# Altium PCB Inter_pcb.PcbDoc
Units mil, origin at the board's own origin, x right, y up, seen from the top; angles counter-clockwise.
Board outline 1810 x 1260 mil, 2 copper layers (Top Layer, Bottom Layer); 6 components, 12 nets, 32 pads, 4 vias.
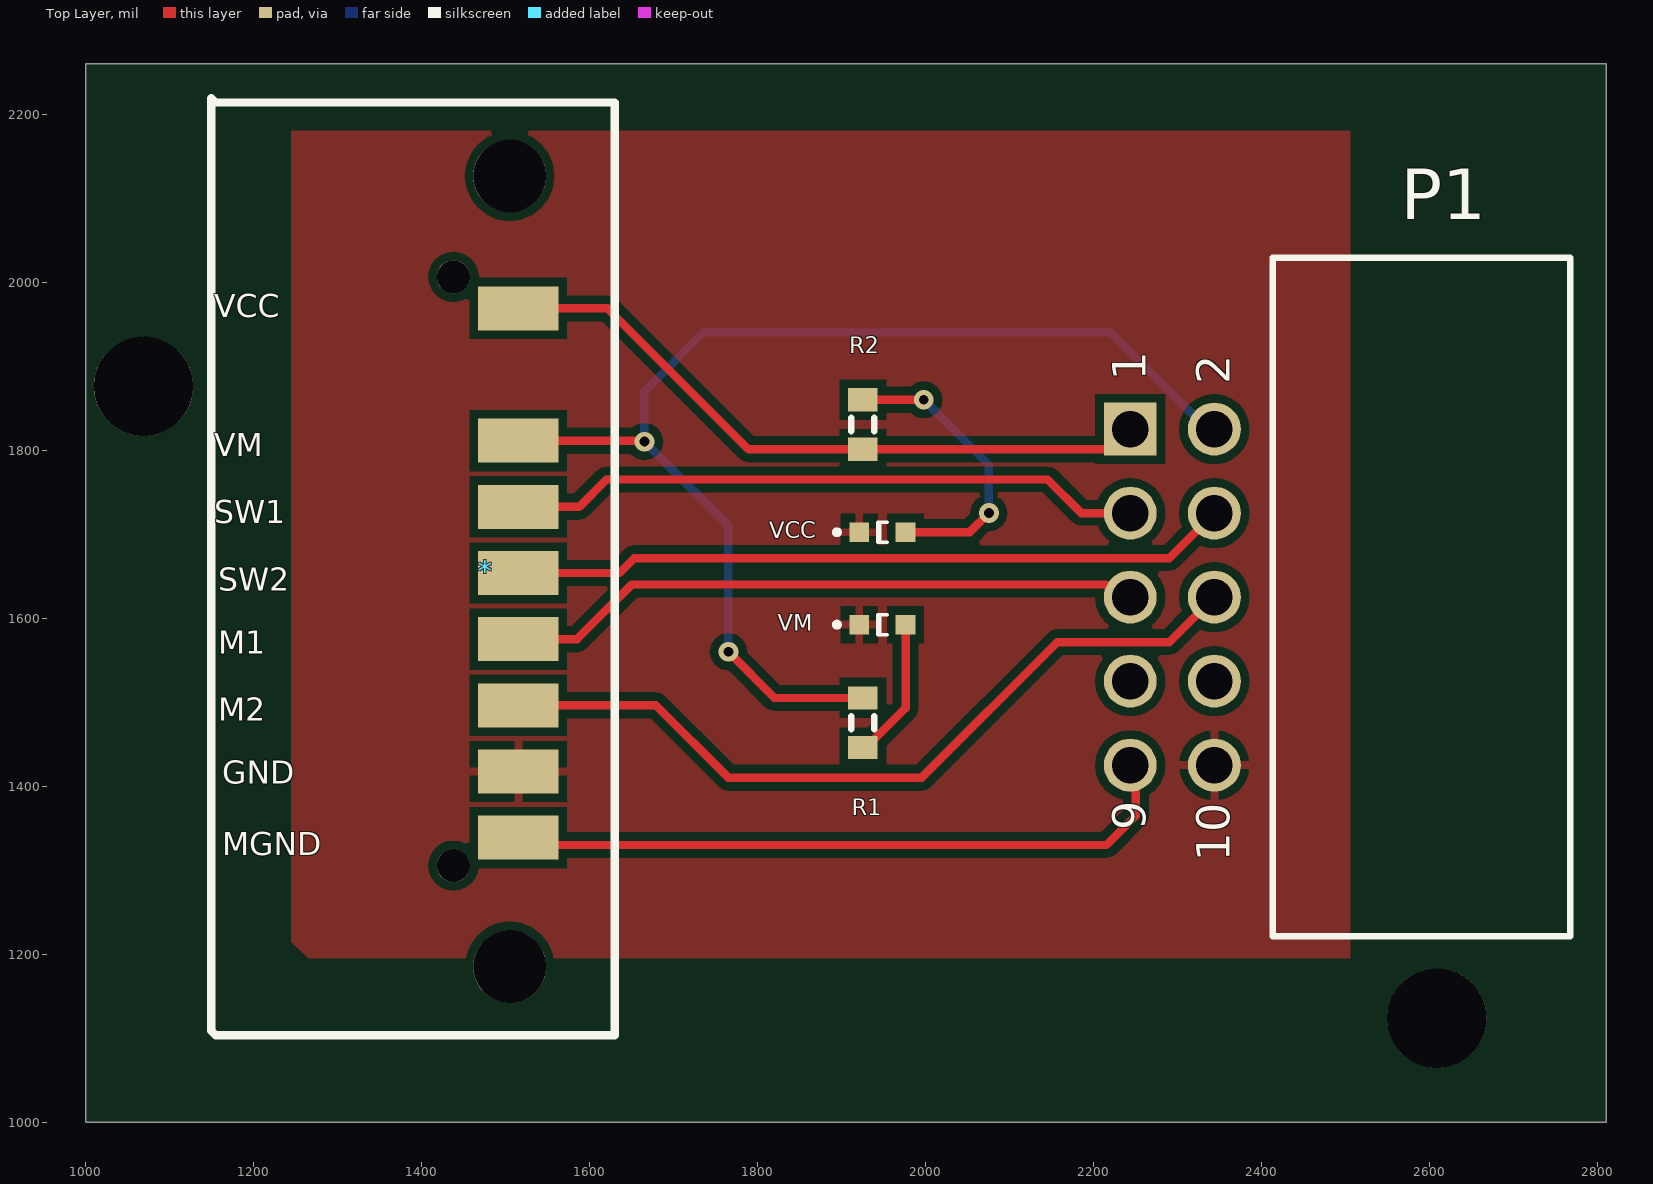
[diagram p0: Top Layer view]
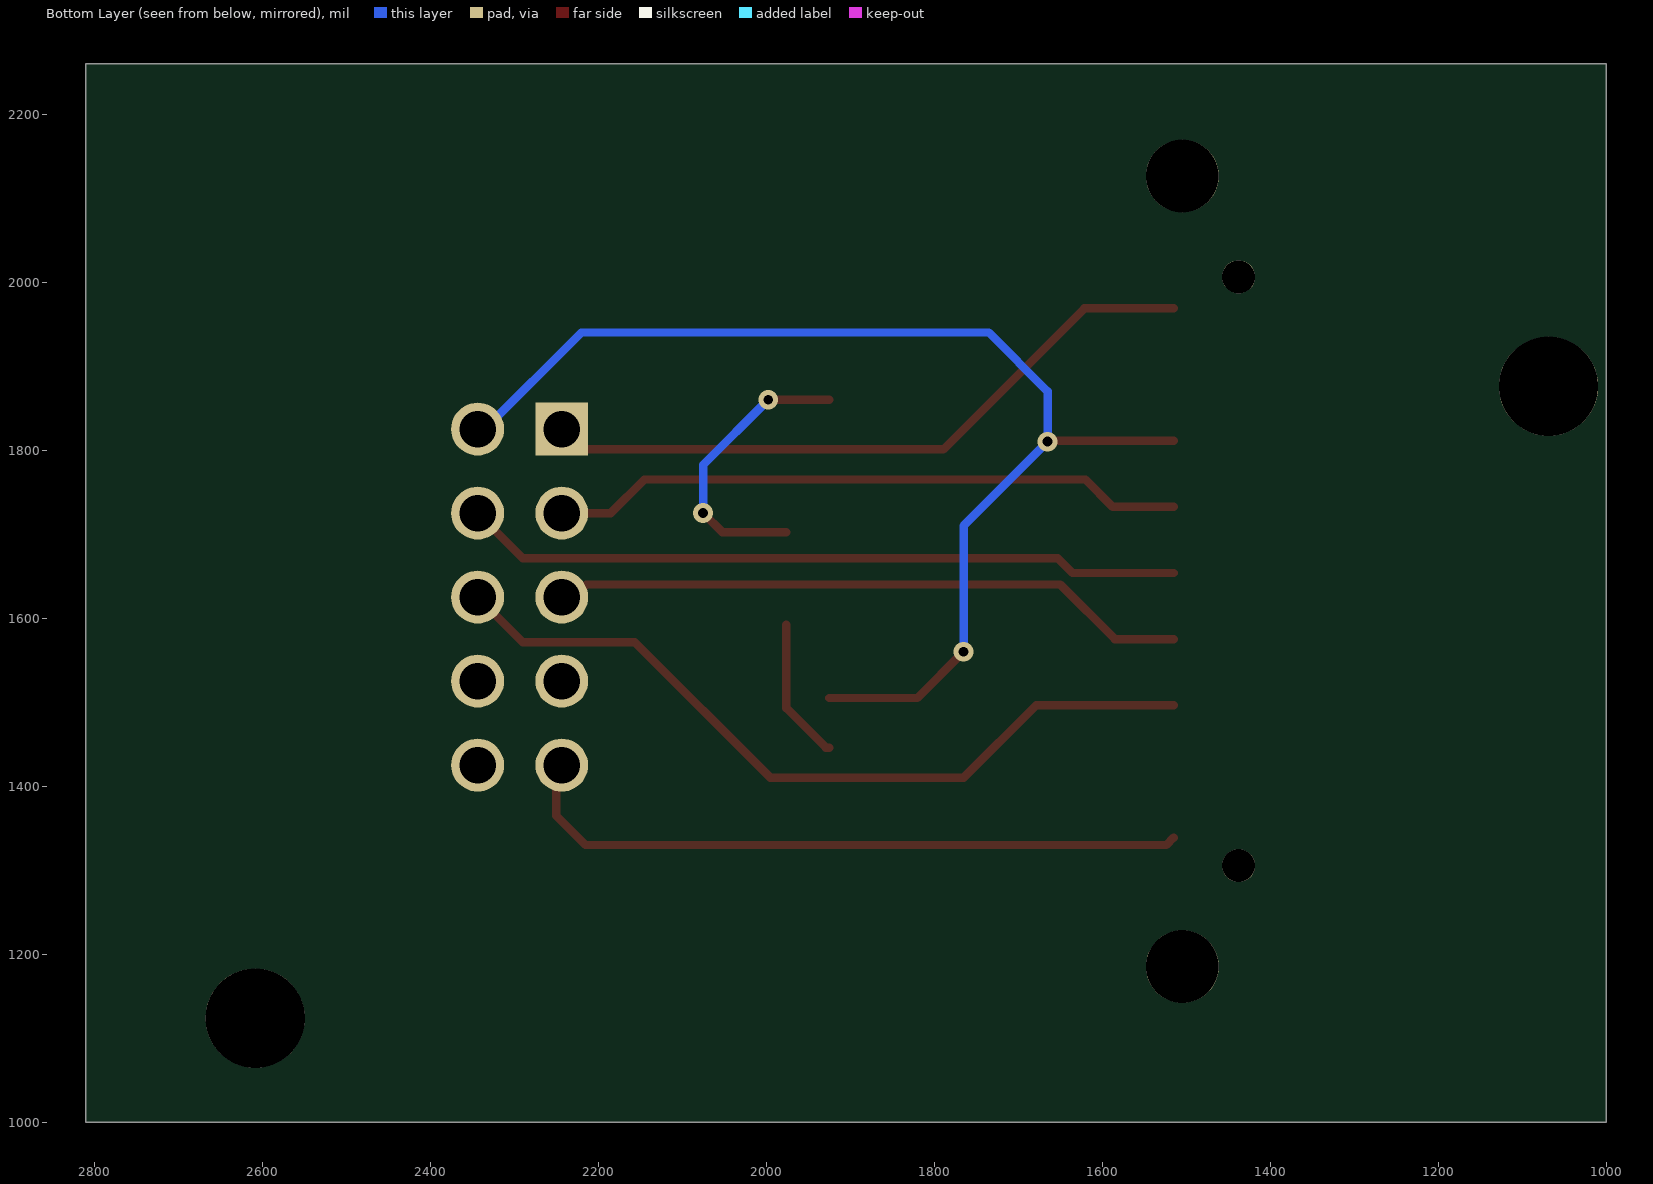
[diagram p1: Bottom Layer view, seen from below]
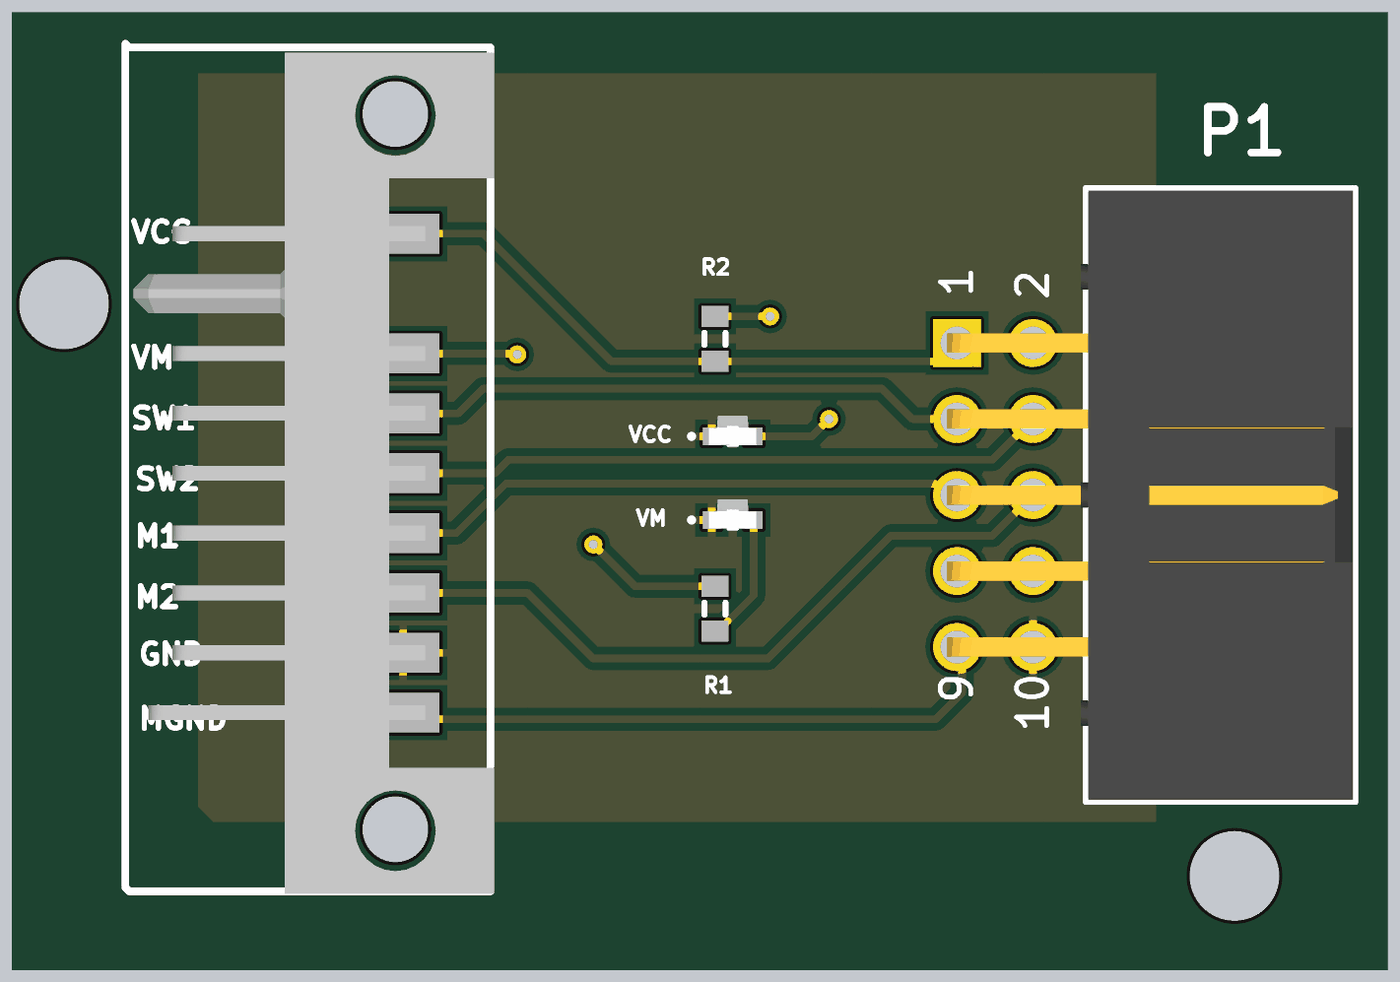
[diagram p2: 3D render of the assembled board from above, using the file's embedded part models]

## Layer stack, top to bottom
Top Solder: solder mask 0.4, Solder Resist, Dk 3.5
Top Layer: signal copper 1.4
Dielectric 1: dielectric 12.6, FR-4, Dk 4.8
Bottom Layer: signal copper 1.4
Bottom Solder: solder mask 0.4, Solder Resist, Dk 3.5

## Board outline
1000,1000 2810,1000 2810,2260 1000,2260

## Design rules (kind name [scope] priority, off if disabled: settings)
Clearance [All] p1: gap=10 ignorepadtopadclearanceinfootprint=FALSE except(0: Arc-Hole Track-Hole SMDPad-Hole THPad-Hole Via-Hole Fill-Hole Poly-Hole Region-Hole Text-Hole)
PolygonConnect [All] p1: connectstyle=Relief reliefconductorwidth=10 reliefentries=4 polygonreliefangle="90 Angle" airgapwidth=10
RoutingVias [All] p1: holewidth=28 width=50 viastyle="Through Hole" minholewidth=28 minwidth=50 maxholewidth=28 maxwidth=50
SolderMaskExpansion [All] p1: expansion=4 istentingtop=FALSE
Width [All] p1: maxlimit=10 minlimit=10 preferedwidth=10
30 further rules are at their usual default settings.

## Classes and differential pairs
component class Inter_sch: * R1

## Components (designator, comment, footprint, x,y, rotation, side; value= is the part's Value field where it differs from the comment)
* "1747785-1" 1747785-1 1437.76,2006.16 r270 top
P1 "61201021721" 61201021721 2590,1625 r90 top (schematic designator P?)
R1 "R4" J1-0603 1925,1475.47 r270 top value=10K
R2 "R3" J1-0603 1925,1830.47 r90 top value=10K
VCC "Red, 2V" WL-SMSW_0603_Rectangular 1948.33,1710.47 r0 top (schematic designator D2)
VM "Red, 2V" WL-SMSW_0603_Rectangular 1948.33,1600.47 r0 top (schematic designator D1)

## Footprints (in the part's own frame and the unit in brackets; to place one, negate y for a bottom-side part, rotate by r counter-clockwise, add the part's x,y. Pads: shape width x height; smd on the part's side, far side on the other; paste and mask are expansions set on the pad)
1747785-1 [mm]
  rect 1.33x2.43 smd: 1(0.951,1.962) 2(4.951,1.962) 3(6.951,1.962) 4(8.952,1.962) 5(10.952,1.962) 6(12.952,1.962) 7(14.952,1.962) 8(16.952,1.962)
  round 2.2 hole 2.2 unplated: ""(-3.05,1.7) ""(20.85,1.7)
  round 1 hole 1 unplated: ""(0,0) ""(17.8,0)
  Top Layer lines w0.254: 20.826,1.7 20.838,1.712
  silkscreen extent -5.4,-7.32 22.92,4.87, body extent -5.1,-7.05 23,5, height 4.71
61201021721 [mm] "10 pins, right angled, gold plating"
  rect 1.6x1.6 hole 1.1: 1(5.08,8.805)
  round 1.6 hole 1.1: 2(5.08,6.265) 3(2.54,8.805) 4(2.54,6.265) 5(0,8.805) 6(0,6.265) 7(-2.54,8.805) 8(-2.54,6.265) 9(-5.08,8.805) 10(-5.08,6.265)
  silkscreen extent -10.26,-4.5 10.26,4.5, body extent -10.18,-4.42 10.18,9.13, height 9.23
J1-0603 [mm] "Chip Resistor, Body 1.6x0.8mm, IPC High Density"
  rect 0.7x0.9 smd: 1(-0.75,0) 2(0.75,0)
  silkscreen extent -0.2,-0.35 0.2,0.35, body extent -0.85,-0.48 0.85,0.48, height 0.9
WL-SMSW_0603_Rectangular [mm] "SMT Mono-color Side view Waterclear, body 1.6x0.98mm"
  rect 0.6x0.6 smd: 1(-0.7,-0.21) 2(0.7,-0.21)
  silkscreen extent -1.45,-0.51 0.15,0.09, body extent -0.8,-0.5 0.8,0.48, height 0.8

## Part data
P1: library part CMP-1502-00021-1, "Male Box Header WR-BHD, THT, Angled, pitch 2.54 mm, 10 pins", Contact Resistance=20mOhm, Manufacturer="Wurth Elektronik", Operating Temperature=-40to125degC, Withstanding Voltage=500VAC, Working Voltage=250VAC, Datasheet URL=https://katalog.we-online.de/em/datasheet/6120xx21721.pdf, Gender=Male, Manufacturer URL=http://www.we-online.de, Mounting Technology=THT, Orientation=Angled, Package Reference=61201021721, Packaging=Tray, Part Number=61201021721, Pin Number=10, Pitch=2.54mm, Published Date=August2018, Publisher=WurthElektronik
R1 R2: library part Res3, "Resistor", LatestRevisionDate=29-May-2009, LatestRevisionNote="IPC-7351 Footprint Added.", PackageDescription="Chip Resistor", PackageReference=J1-0603, Published=8-Jun-2000, Publisher="Altium Limited"
VCC VM: library part 155060RS75300, "WL-SMSW SMT Mono-color Side View Waterclear, size 0603, Red, 2V, 140deg", Emitting Color=Red, Forward Voltage typ.=2V, Manufacturer="Wurth Elektronik", Operating Temperature="-40 to +85degC", Chip Technology=AlInGaP, ComponentLink1Description=Manufacturer, ComponentLink1URL=http://www.we-online.de, ComponentLink2Description=Datasheet, ComponentLink2URL=https://www.we-online.com/catalog/datasheet/155060RS75300.pdf, Dominant Wavelength typ.=625nm, Luminous Intensity typ.=150mcd, Manufacturer Part Number=155060RS75300, Mounting Technology=SMT, Packaging="Tape and Reel", Peak Wavelength typ.=630nm, Published Date="October 2020", Size=0603, Viewing Angle=140deg

## Free pads (board coordinates)
  round 118.11 hole 118.11 unplated: ""(1068.82,1875.91) ""(2608.19,1123.94)

## Via types
v1: diameter 23.62, hole 11.81, Top Layer to Bottom Layer, 4 vias

## Nets (pads, with @x,y where several pads share a name; then routed paths per layer and width w, separated by ;. In a path a pad name is that pad's centre, name@x,y a point inside that pad or via, vN(x,y) a via of type N, cw(c..) or ccw(c..) an arc to the next point about the centre after c; other vN are vias at no path point)
GND: *.7 P1.10 VCC.1 VM.1
"Input 1": *.5 P1.5 | length 761.5
  Top Layer w10: *.5 1585,1575 1650,1640 2214.01,1640 2229.01,1625 P1.5
"Input 2": *.6 P1.6 | length 953.1
  Top Layer w10: *.6 1678.74,1496.26 1765,1410 1995,1410 2156.5,1571.5 2289.84,1571.5 P1.6
MGND: *.8 P1.9 | length 815.9
  Top Layer w10: *.8 1523.78,1330 2215,1330 2250,1365 2250,1418.35 P1.9
NetD1_2: R1.2 VM.2 | length 169.6
  Top Layer w10: R1.2 1928.94,1445.94 1975.89,1492.9 VM.2
NetD2_2: R2.2 VCC.2 | length 348.1
  Top Layer w10: R2.2 1997.5,1860 v1(1997.57,1859.92) ; VCC.2 2052.2,1702.2 v1(2075,1725)
  Bottom Layer w10: v1(1997.57,1859.92) 2075,1782.5 v1(2075,1725)
PWM: P1.8
signal1: *.3 P1.3 | length 758.4
  Top Layer w10: *.3 1587.48,1732.48 1620,1765 2145,1765 2185,1725 P1.3
signal2: *.4 P1.4 | length 857.9
  Top Layer w10: *.4 1635.46,1653.74 1653.21,1671.5 2289.84,1671.5 P1.4
STBY: P1.7
VCC: *.1 P1.1 R2.1 | length 807.8
  Top Layer w10: *.1 1621.3,1968.7 1789.06,1800.94 1930,1800.94 2219.29,1800.94 P1.1
VM: *.2 P1.2 R1.1 | length 1454
  Top Layer w10: *.2 1663.78,1811.22 v1(1665,1810) ; v1(1765,1560) 1820,1505 R1.1 ; P1.2 P1.2@2343.35,1839.34
  Bottom Layer w10: v1(1765,1560) 1765,1710 v1(1665,1810) 1665,1870 1735,1940 2220,1940 2335,1825 P1.2
pads on no net: *.

## Polygon pours and split planes (outlines as drawn)
GND on Top Layer "GND_L01_P001" (solid, pour order 1): 2505,1195 2505,2180 1245,2180 1245,1215 1265,1195

## Silkscreen, mask and mechanical layers (free items; w line width, h text height)
Top Overlay:
  text "VCC" at 1152.87,1957.87 h27.56
  text "VM" at 1152.87,1792.87 h27.56
  text "SW1" at 1152.87,1712.87 h27.56
  text "SW2" at 1157.87,1632.87 h27.56
  text "M1" at 1157.87,1557.87 h27.56
  text "M2" at 1157.87,1477.87 h27.56
  text "GND" at 1162.87,1402.87 h27.56
  text "MGND" at 1162.87,1317.87 h27.56

## Text inside footprints (layer, text, board x,y; h text height)
P1: Top Overlay "1" at 2261.65,1882.48 h40 r90; Top Overlay "2" at 2361.65,1878.54 h40 r90; Top Overlay "10" at 2361.65,1310.04 h40 r90; Top Overlay "9" at 2261.65,1347.83 h40 r90